# EAGLE board Motor_Cape (EAGLE 7.7.0)
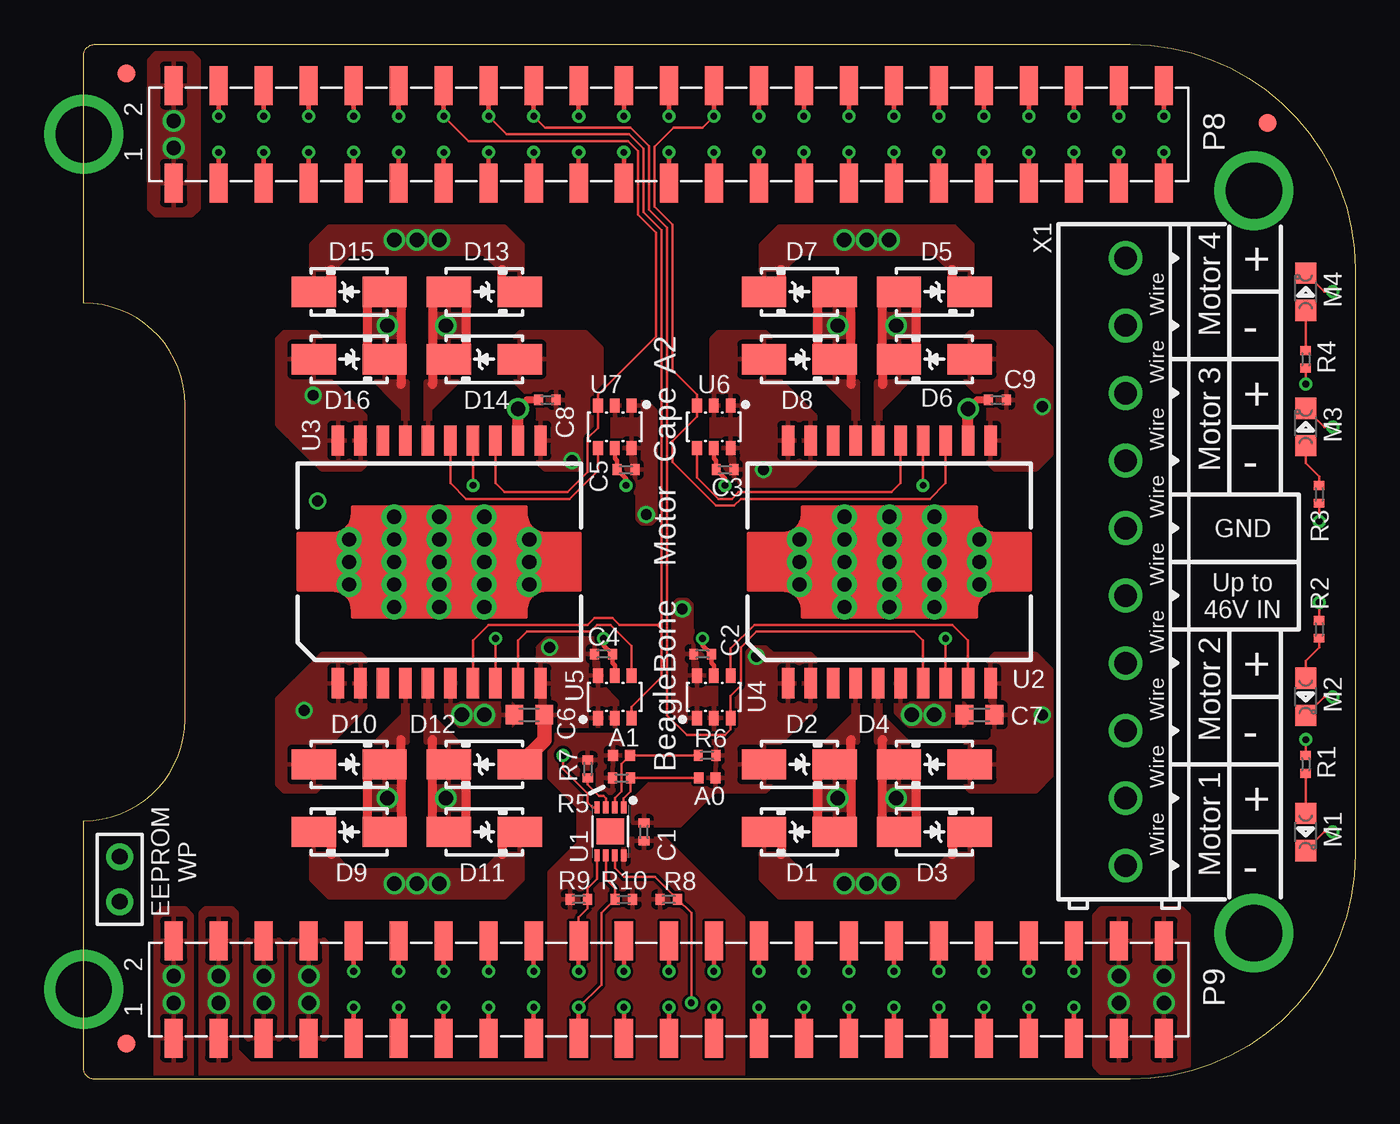
[diagram p0: board, top side]
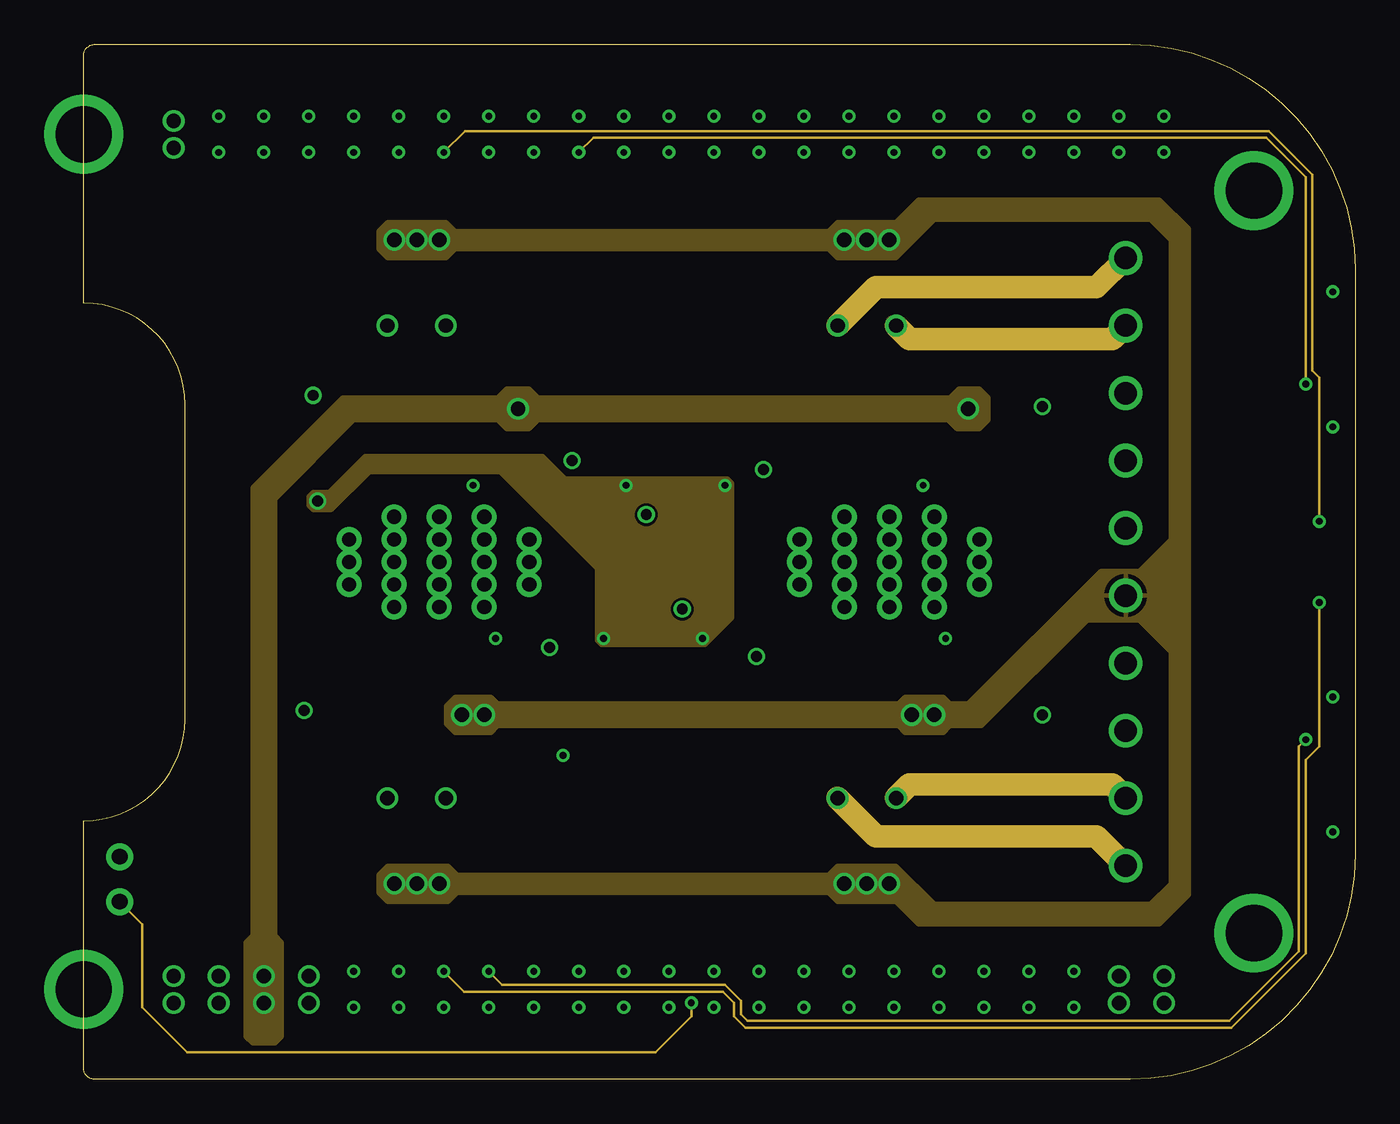
[diagram p1: board, inner layer Power]
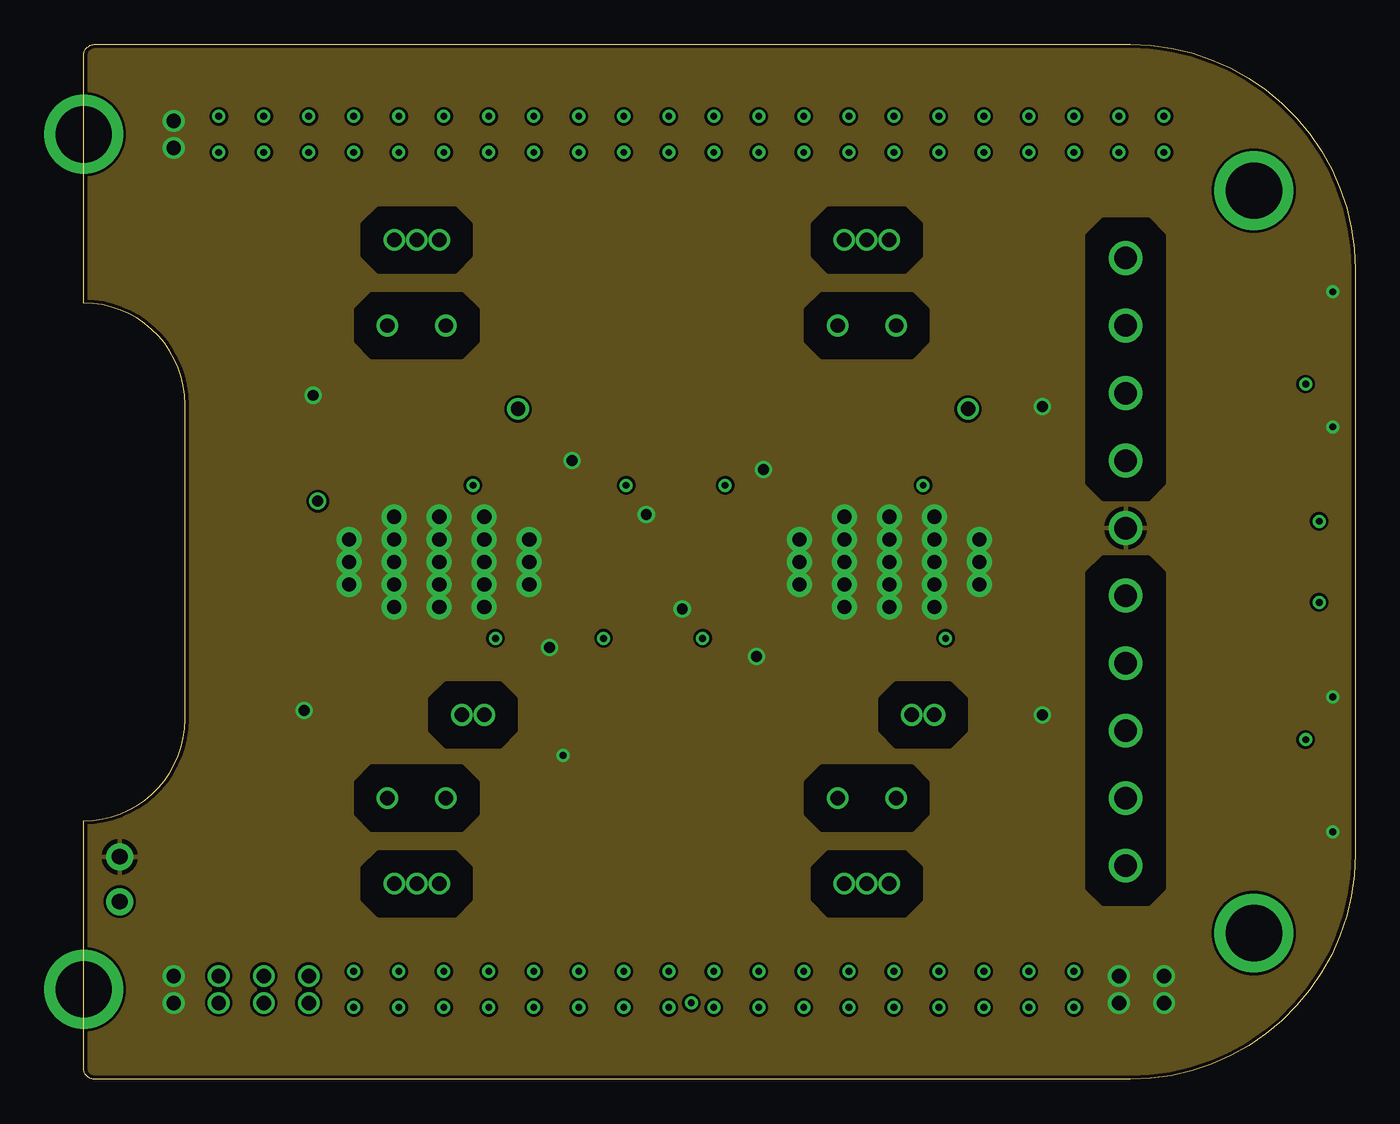
[diagram p2: board, inner layer Ground]
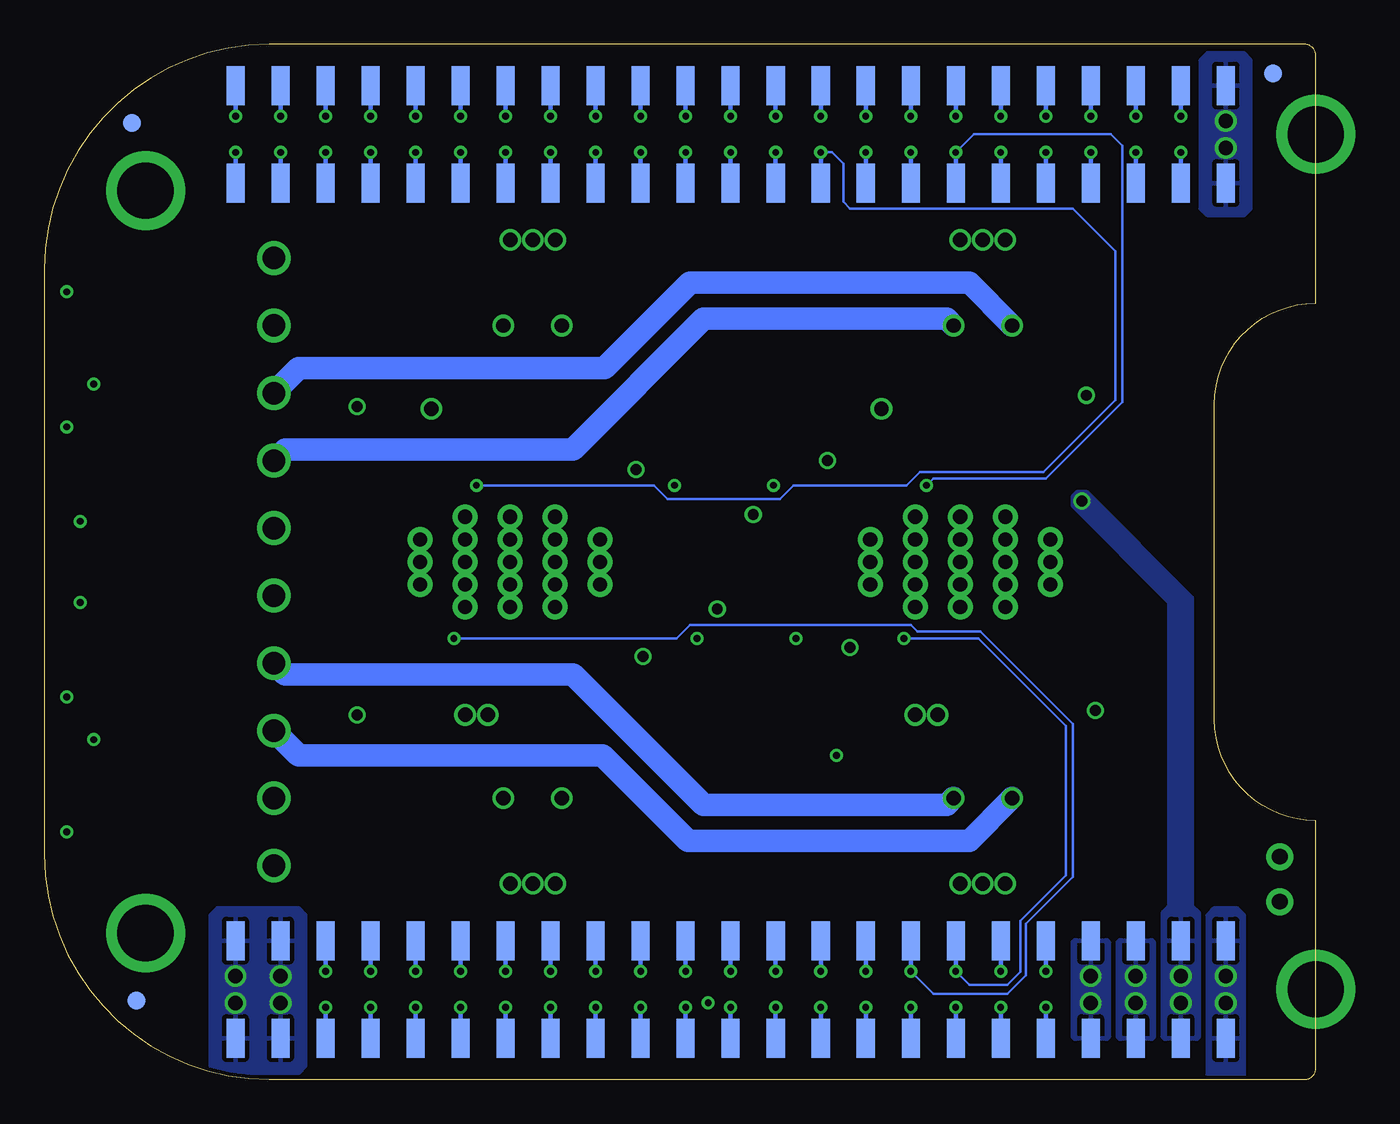
[diagram p3: board, bottom side, seen from below]

Size 71.75 x 58.42 mm. Coordinates in mm from the lower left corner, seen from the top.
Copper layers (1+2+15+16): Top 0.035mm / dielectric 1.5mm / Power 0.035mm / dielectric 0.15mm / Ground 0.035mm / dielectric 0.2mm / Bottom 0.035mm
Design rules "SparkFun-2-layer *": minimum track width 6mil, minimum drill 15mil, track to track 6mil, track to pad 6mil, pad to pad 6mil, via to via 6mil, smd to smd 6mil, copper to edge 8mil, drill to drill 8mil, minimum pad ring 12mil, minimum via ring 7mil, stop-mask expansion 4mil, vias tented up to drill 32mil, thermal gap 10mil
tRestrict: area 14.9,22 to 15.1,22.7; area 40.3,22 to 40.5,22.7; area 40.3,35.7 to 40.5,36.4; area 14.9,35.7 to 15.1,36.4; 4 lines

## Footprints (pad centres in the part's own frame; a part is rotated, then mirrored left to right if it is on the bottom)
BEAGLEBONE.CAPE.TOP/BOTTOM-PADS = smd 1.02 x 2.2 bottom: B8.1 5.08,50.59; B8.2 5.08,56.09; B8.3 7.62,50.59; B8.4 7.62,56.09; B8.5 10.16,50.59; B8.6 10.16,56.09; B8.7 12.7,50.59; B8.8 12.7,56.09; B8.9 15.24,50.59; B8.10 15.24,56.09; B8.11 17.78,50.59; B8.12 17.78,56.09; B8.13 20.32,50.59; B8.14 20.32,56.09; B8.15 22.86,50.59; B8.16 22.86,56.09; B8.17 25.4,50.59; B8.18 25.4,56.09; B8.19 27.94,50.59; B8.20 27.94,56.09; B8.21 30.48,50.59; B8.22 30.48,56.09; B8.23 33.02,50.59; B8.24 33.02,56.09; B8.25 35.56,50.59; B8.26 35.56,56.09; B8.27 38.1,50.59; B8.28 38.1,56.09; B8.29 40.64,50.59; B8.30 40.64,56.09; B8.31 43.18,50.59; B8.32 43.18,56.09; B8.33 45.72,50.59; B8.34 45.72,56.09; B8.35 48.26,50.59; B8.36 48.26,56.09; B8.37 50.8,50.59; B8.38 50.8,56.09; B8.39 53.34,50.59; B8.40 53.34,56.09; B8.41 55.88,50.59; B8.42 55.88,56.09; B8.43 58.42,50.59; B8.44 58.42,56.09; B8.45 60.96,50.59; B8.46 60.96,56.09; B9.1 5.08,2.33; B9.2 5.08,7.83; B9.3 7.62,2.33; B9.4 7.62,7.83; B9.5 10.16,2.33; B9.6 10.16,7.83; B9.7 12.7,2.33; B9.8 12.7,7.83; B9.9 15.24,2.33; B9.10 15.24,7.83; B9.11 17.78,2.33; B9.12 17.78,7.83; B9.13 20.32,2.33; B9.14 20.32,7.83; B9.15 22.86,2.33; B9.16 22.86,7.83; B9.17 25.4,2.33; B9.18 25.4,7.83; B9.19 27.94,2.33; B9.20 27.94,7.83; B9.21 30.48,2.33; B9.22 30.48,7.83; B9.23 33.02,2.33; B9.24 33.02,7.83; B9.25 35.56,2.33; B9.26 35.56,7.83; B9.27 38.1,2.33; B9.28 38.1,7.83; B9.29 40.64,2.33; B9.30 40.64,7.83; B9.31 43.18,2.33; B9.32 43.18,7.83; B9.33 45.72,2.33; B9.34 45.72,7.83; B9.35 48.26,2.33; B9.36 48.26,7.83; B9.37 50.8,2.33; B9.38 50.8,7.83; B9.39 53.34,2.33; B9.40 53.34,7.83; B9.41 55.88,2.33; B9.42 55.88,7.83; B9.43 58.42,2.33; B9.44 58.42,7.83; B9.45 60.96,2.33; B9.46 60.96,7.83 | drill 3.175 pad 4.445: MH.1 0,5.08; MH.2 66.04,8.255; MH.3 66.04,50.165; MH.4 0,53.34 | smd 1.02 x 2.2: T8.1 5.08,50.59; T8.2 5.08,56.09; T8.3 7.62,50.59; T8.4 7.62,56.09; T8.5 10.16,50.59; T8.6 10.16,56.09; T8.7 12.7,50.59; T8.8 12.7,56.09; T8.9 15.24,50.59; T8.10 15.24,56.09; T8.11 17.78,50.59; T8.12 17.78,56.09; T8.13 20.32,50.59; T8.14 20.32,56.09; T8.15 22.86,50.59; T8.16 22.86,56.09; T8.17 25.4,50.59; T8.18 25.4,56.09; T8.19 27.94,50.59; T8.20 27.94,56.09; T8.21 30.48,50.59; T8.22 30.48,56.09; T8.23 33.02,50.59; T8.24 33.02,56.09; T8.25 35.56,50.59; T8.26 35.56,56.09; T8.27 38.1,50.59; T8.28 38.1,56.09; T8.29 40.64,50.59; T8.30 40.64,56.09; T8.31 43.18,50.59; T8.32 43.18,56.09; T8.33 45.72,50.59; T8.34 45.72,56.09; T8.35 48.26,50.59; T8.36 48.26,56.09; T8.37 50.8,50.59; T8.38 50.8,56.09; T8.39 53.34,50.59; T8.40 53.34,56.09; T8.41 55.88,50.59; T8.42 55.88,56.09; T8.43 58.42,50.59; T8.44 58.42,56.09; T8.45 60.96,50.59; T8.46 60.96,56.09; T9.1 5.08,2.33; T9.2 5.08,7.83; T9.3 7.62,2.33; T9.4 7.62,7.83; T9.5 10.16,2.33; T9.6 10.16,7.83; T9.7 12.7,2.33; T9.8 12.7,7.83; T9.9 15.24,2.33; T9.10 15.24,7.83; T9.11 17.78,2.33; T9.12 17.78,7.83; T9.13 20.32,2.33; T9.14 20.32,7.83; T9.15 22.86,2.33; T9.16 22.86,7.83; T9.17 25.4,2.33; T9.18 25.4,7.83; T9.19 27.94,2.33; T9.20 27.94,7.83; T9.21 30.48,2.33; T9.22 30.48,7.83; T9.23 33.02,2.33; T9.24 33.02,7.83; T9.25 35.56,2.33; T9.26 35.56,7.83; T9.27 38.1,2.33; T9.28 38.1,7.83; T9.29 40.64,2.33; T9.30 40.64,7.83; T9.31 43.18,2.33; T9.32 43.18,7.83; T9.33 45.72,2.33; T9.34 45.72,7.83; T9.35 48.26,2.33; T9.36 48.26,7.83; T9.37 50.8,2.33; T9.38 50.8,7.83; T9.39 53.34,2.33; T9.40 53.34,7.83; T9.41 55.88,2.33; T9.42 55.88,7.83; T9.43 58.42,2.33; T9.44 58.42,7.83; T9.45 60.96,2.33; T9.46 60.96,7.83
0402 = smd 0.5 x 0.6: 1 -0.5,0; 2 0.5,0
0603 = smd 1 x 1.1: 1 -0.85,0; 2 0.85,0
SMA(DIODES) = smd 2.5 x 1.7: A 2,0; K -2,0
FIDUCIAL_40MIL = smd 1.016 x 1.016: P$1 0,0
JUMPER-(X2) = drill 0.889 pad 1.524: 1 -1.27,0; 2 1.27,0
0805-LED = smd 1.2 x 1.2: A 0,1.05; K 0,-1.05
SOLDER.JOINT(0402) = smd 0.55 x 0.6: 1 -0.475,0; 2 0.475,0
UDFN8,2X3(ON-SEMI) = smd 0.3 x 0.68: 1 0.75,1.36; 2 0.25,1.36; 3 -0.25,1.36; 4 -0.75,1.36; 5 -0.75,-1.36; 6 -0.25,-1.36; 7 0.25,-1.36; 8 0.75,-1.36 | smd 1.56 x 1.45: P$1 0,0
POWER.SO-20(ST)-A.W/TV = smd 0.7 x 1.7: 1 -5.715,-6.85; 2 -4.445,-6.85; 3 -3.175,-6.85; 4 -1.905,-6.85; 5 -0.635,-6.85; 6 0.635,-6.85; 7 1.905,-6.85; 8 3.175,-6.85; 9 4.445,-6.85; 10 5.715,-6.85; 11 5.715,6.85; 12 4.445,6.85; 13 3.175,6.85; 14 1.905,6.85; 15 0.635,6.85; 16 -0.635,6.85; 17 -1.905,6.85; 18 -3.175,6.85; 19 -4.445,6.85; 20 -5.715,6.85 | smd 1 x 1: THERMAL.PAD 0,0 | drill 0.8: TV1 -5.08,1.27; TV2 -5.08,0; TV3 -5.08,-1.27; TV4 -2.54,2.54; TV5 -2.54,1.27; TV6 -2.54,0; TV7 -2.54,-1.27; TV8 -2.54,-2.54; TV9 0,2.54; TV10 0,1.27; TV11 0,0; TV12 0,-1.27; TV13 0,-2.54; TV14 2.54,2.54; TV15 2.54,1.27; TV16 2.54,0; TV17 2.54,-1.27; TV18 2.54,-2.54; TV19 5.08,1.27; TV20 5.08,0; TV21 5.08,-1.27
SOT-23-6 = smd 0.55 x 0.8: GND 0,-1.2; IN0 0.95,-1.2; IN1 -0.95,-1.2; IN2 -0.95,1.2; VCC 0,1.2; Y 0.95,1.2
TERMINAL.BLOCK-10TERM-150MIL.PITCH = drill 1.27 pad 1.905: 1 -17.145,0; 2 -13.335,0; 3 -9.525,0; 4 -5.715,0; 5 -1.905,0; 6 1.905,0; 7 5.715,0; 8 9.525,0; 9 13.335,0; 10 17.145,0

## Placement (x,y rotation side)
BB.CAPE1  BEAGLEBONE.CAPE.TOP/BOTTOM-PADS  [BEAGLEBONE.CAPE.TOP/BOTTOM-PADS]  0,0 0 top
C1  .1uF  [0402]  31.62,13.97 90 top
C2  .1uF  [0402]  34.92,24 180 top
C3  .1uF  [0402]  36.2,34.42 0 top
C4  .1uF  [0402]  29.34,24 180 top
C5  .1uF  [0402]  30.61,34.42 0 top
C6  .1uF 50V  [0603]  25.15,20.57 0 top
C7  .1uF 50V  [0603]  50.55,20.57 0 top
C8  .1uF  [0402]  26.16,38.35 0 top
C9  .1uF  [0402]  51.56,38.35 0 top
D1  B260A-13-F 60V 2A  [SMA(DIODES)]  40.39,13.97 0 top
D2  B260A-13-F 60V 2A  [SMA(DIODES)]  40.39,17.78 180 top
D3  B260A-13-F 60V 2A  [SMA(DIODES)]  48.01,13.97 180 top
D4  B260A-13-F 60V 2A  [SMA(DIODES)]  48.01,17.78 0 top
D5  B260A-13-F 60V 2A  [SMA(DIODES)]  48.01,44.45 180 top
D6  B260A-13-F 60V 2A  [SMA(DIODES)]  48.01,40.64 0 top
D7  B260A-13-F 60V 2A  [SMA(DIODES)]  40.39,44.45 0 top
D8  B260A-13-F 60V 2A  [SMA(DIODES)]  40.39,40.64 180 top
D9  B260A-13-F 60V 2A  [SMA(DIODES)]  14.99,13.97 0 top
D10  B260A-13-F 60V 2A  [SMA(DIODES)]  14.99,17.78 180 top
D11  B260A-13-F 60V 2A  [SMA(DIODES)]  22.61,13.97 180 top
D12  B260A-13-F 60V 2A  [SMA(DIODES)]  22.61,17.78 0 top
D13  B260A-13-F 60V 2A  [SMA(DIODES)]  22.61,44.45 180 top
D14  B260A-13-F 60V 2A  [SMA(DIODES)]  22.61,40.64 0 top
D15  B260A-13-F 60V 2A  [SMA(DIODES)]  14.99,44.45 0 top
D16  B260A-13-F 60V 2A  [SMA(DIODES)]  14.99,40.64 180 top
FUD1  FIDUCIAL  [FIDUCIAL_40MIL]  2.41,2.03 0 top
FUD2  FIDUCIAL  [FIDUCIAL_40MIL]  66.8,53.98 0 top
FUD3  FIDUCIAL  [FIDUCIAL_40MIL]  2.41,56.77 0 top
FUD4  FIDUCIAL  [FIDUCIAL_40MIL]  66.55,4.45 0 bottom
FUD5  FIDUCIAL  [FIDUCIAL_40MIL]  2.41,56.77 0 bottom
FUD6  FIDUCIAL  [FIDUCIAL_40MIL]  66.8,53.98 0 bottom
JMP1  JUMPER-(X2)  [JUMPER-(X2)]  2.03,11.3 90 top
M1  RED  [0805-LED]  68.96,13.97 0 top
M2  RED  [0805-LED]  68.96,21.59 0 top
M3  RED  [0805-LED]  68.96,36.83 180 top
M4  RED  [0805-LED]  68.96,44.45 180 top
R1  1k  [0402]  68.96,17.78 270 top
R2  1k  [0402]  69.72,25.4 270 top
R3  1k  [0402]  69.72,33.02 270 top
R4  1k  [0402]  68.96,40.64 270 top
R5  1k  [0402]  30.35,17.02 0 top
R6  1k  [0402]  35.18,18.29 180 top
R7  1k  [0402]  28.45,17.53 270 top
R8  1k  [0402]  33.02,10.16 180 top
R9  DNP(2.2k)  [0402]  27.94,10.16 180 top
R10  DNP(2.2k)  [0402]  30.48,10.16 0 top
SJ1  [SOLDER.JOINT(0402)]  35.18,17.02 180 top
SJ2  [SOLDER.JOINT(0402)]  30.35,18.29 0 top
U1  [UDFN8,2X3(ON-SEMI)]  29.72,14 0 top
U2  [POWER.SO-20(ST)-A.W/TV]  45.47,29.21 0 top
U3  [POWER.SO-20(ST)-A.W/TV]  20.07,29.21 0 top
U4  74LVC1G57  [SOT-23-6]  35.56,21.59 0 top
U5  74LVC1G57  [SOT-23-6]  29.97,21.59 0 top
U6  74LVC1G57  [SOT-23-6]  35.56,36.83 180 top
U7  74LVC1G57  [SOT-23-6]  29.97,36.83 180 top
X1  [TERMINAL.BLOCK-10TERM-150MIL.PITCH]  58.8,29.21 270 top

## Library data of the parts
BB.CAPE1 = GHI-Solutions
C1-C9 D1-D16 M1-M4 R1-R10 = GHI-BasicComponents
FUD1-FUD6 = GHI
JMP1 = GHI-Headers
SJ1 SJ2 = GHI-Miscellaneous
U1-U7 = GHI-IC
X1 = GHI-Connectors

## Nets
+5V [power]: BB.CAPE1.B9.5 BB.CAPE1.B9.6 BB.CAPE1.T9.5 BB.CAPE1.T9.6 C8.1 C9.1 U2.12 U3.12
A0: R5.2 SJ1.2 U1.1
A1: R6.2 SJ2.2 U1.2
A2: R7.2 U1.3
GND: BB.CAPE1.B8.1 BB.CAPE1.B8.2 BB.CAPE1.B9.1 BB.CAPE1.B9.2 BB.CAPE1.B9.43 BB.CAPE1.B9.44 BB.CAPE1.B9.45 BB.CAPE1.B9.46 BB.CAPE1.T8.1 BB.CAPE1.T8.2 BB.CAPE1.T9.1 BB.CAPE1.T9.2 BB.CAPE1.T9.43 BB.CAPE1.T9.44 BB.CAPE1.T9.45 BB.CAPE1.T9.46 C1.2 C2.2 C3.2 C4.2 C5.2 C6.2 C7.2 C8.2 C9.2 D2.A D4.A D6.A D8.A D10.A D12.A D14.A D16.A JMP1.2 M1.K M2.K M3.K M4.K R6.1 SJ1.1 U1.4 U2.1 U2.2 U2.10 U2.11 U2.19 U2.20 U2.THERMAL.PAD U2.TV1 U2.TV2 U2.TV3 U2.TV4 U2.TV5 U2.TV6 U2.TV7 U2.TV8 U2.TV9 U2.TV10 U2.TV11 U2.TV12 U2.TV13 U2.TV14 U2.TV15 U2.TV16 U2.TV17 U2.TV18 U2.TV19 U2.TV20 U2.TV21 U3.1 U3.2 U3.10 U3.11 U3.19 U3.20 U3.THERMAL.PAD U3.TV1 U3.TV2 U3.TV3 U3.TV4 U3.TV5 U3.TV6 U3.TV7 U3.TV8 U3.TV9 U3.TV10 U3.TV11 U3.TV12 U3.TV13 U3.TV14 U3.TV15 U3.TV16 U3.TV17 U3.TV18 U3.TV19 U3.TV20 U3.TV21 U4.GND U4.IN1 U4.IN2 U5.GND U5.IN1 U5.IN2 U6.GND U6.IN1 U6.IN2 U7.GND U7.IN1 U7.IN2 X1.5
M1+: D3.A D4.K U2.5 X1.9
M1-: D1.A D2.K U2.4 X1.10
M1.HIGH: BB.CAPE1.B8.18 BB.CAPE1.T8.18 U2.7 U4.IN0
M1.LOW: U2.9 U4.Y
M1.PWM1.B: BB.CAPE1.B9.16 BB.CAPE1.T9.16 R1.1 U2.8
M2+: D11.A D12.K U3.5 X1.7
M2-: D9.A D10.K U3.4 X1.8
M2.HIGH: BB.CAPE1.B8.16 BB.CAPE1.T8.16 U3.7 U5.IN0
M2.LOW: U3.9 U5.Y
M2.PWM1.A: BB.CAPE1.B9.14 BB.CAPE1.T9.14 R2.1 U3.8
M3+: D15.A D16.K U3.17 X1.3
M3-: D13.A D14.K U3.16 X1.4
M3.HIGH: BB.CAPE1.B8.14 BB.CAPE1.T8.14 U3.13 U7.IN0
M3.LOW: U3.15 U7.Y
M3.PWM2.B: BB.CAPE1.B8.13 BB.CAPE1.T8.13 R3.2 U3.14
M4+: D7.A D8.K U2.17 X1.1
M4-: D5.A D6.K U2.16 X1.2
M4.HIGH: BB.CAPE1.B8.26 BB.CAPE1.T8.26 U2.13 U6.IN0
M4.LOW: U2.15 U6.Y
M4.PWM2.A: BB.CAPE1.B8.19 BB.CAPE1.T8.19 R4.2 U2.14
N$3: M1.A R1.2
N$4: M2.A R2.2
N$5: M3.A R3.1
N$6: M4.A R4.1
P8.3: BB.CAPE1.B8.3 BB.CAPE1.T8.3
P8.4: BB.CAPE1.B8.4 BB.CAPE1.T8.4
P8.5: BB.CAPE1.B8.5 BB.CAPE1.T8.5
P8.6: BB.CAPE1.B8.6 BB.CAPE1.T8.6
P8.7: BB.CAPE1.B8.7 BB.CAPE1.T8.7
P8.8: BB.CAPE1.B8.8 BB.CAPE1.T8.8
P8.9: BB.CAPE1.B8.9 BB.CAPE1.T8.9
P8.10: BB.CAPE1.B8.10 BB.CAPE1.T8.10
P8.11: BB.CAPE1.B8.11 BB.CAPE1.T8.11
P8.12: BB.CAPE1.B8.12 BB.CAPE1.T8.12
P8.15: BB.CAPE1.B8.15 BB.CAPE1.T8.15
P8.17: BB.CAPE1.B8.17 BB.CAPE1.T8.17
P8.20: BB.CAPE1.B8.20 BB.CAPE1.T8.20
P8.21: BB.CAPE1.B8.21 BB.CAPE1.T8.21
P8.22: BB.CAPE1.B8.22 BB.CAPE1.T8.22
P8.23: BB.CAPE1.B8.23 BB.CAPE1.T8.23
P8.24: BB.CAPE1.B8.24 BB.CAPE1.T8.24
P8.25: BB.CAPE1.B8.25 BB.CAPE1.T8.25
P8.27: BB.CAPE1.B8.27 BB.CAPE1.T8.27
P8.28: BB.CAPE1.B8.28 BB.CAPE1.T8.28
P8.29: BB.CAPE1.B8.29 BB.CAPE1.T8.29
P8.30: BB.CAPE1.B8.30 BB.CAPE1.T8.30
P8.31: BB.CAPE1.B8.31 BB.CAPE1.T8.31
P8.32: BB.CAPE1.B8.32 BB.CAPE1.T8.32
P8.33: BB.CAPE1.B8.33 BB.CAPE1.T8.33
P8.34: BB.CAPE1.B8.34 BB.CAPE1.T8.34
P8.35: BB.CAPE1.B8.35 BB.CAPE1.T8.35
P8.36: BB.CAPE1.B8.36 BB.CAPE1.T8.36
P8.37: BB.CAPE1.B8.37 BB.CAPE1.T8.37
P8.38: BB.CAPE1.B8.38 BB.CAPE1.T8.38
P8.39: BB.CAPE1.B8.39 BB.CAPE1.T8.39
P8.40: BB.CAPE1.B8.40 BB.CAPE1.T8.40
P8.41: BB.CAPE1.B8.41 BB.CAPE1.T8.41
P8.42: BB.CAPE1.B8.42 BB.CAPE1.T8.42
P8.43: BB.CAPE1.B8.43 BB.CAPE1.T8.43
P8.44: BB.CAPE1.B8.44 BB.CAPE1.T8.44
P8.45: BB.CAPE1.B8.45 BB.CAPE1.T8.45
P8.46: BB.CAPE1.B8.46 BB.CAPE1.T8.46
P9.9: BB.CAPE1.B9.9 BB.CAPE1.T9.9
P9.10: BB.CAPE1.B9.10 BB.CAPE1.T9.10
P9.11: BB.CAPE1.B9.11 BB.CAPE1.T9.11
P9.12: BB.CAPE1.B9.12 BB.CAPE1.T9.12
P9.13: BB.CAPE1.B9.13 BB.CAPE1.T9.13
P9.15: BB.CAPE1.B9.15 BB.CAPE1.T9.15
P9.17: BB.CAPE1.B9.17 BB.CAPE1.T9.17
P9.18: BB.CAPE1.B9.18 BB.CAPE1.T9.18
P9.21: BB.CAPE1.B9.21 BB.CAPE1.T9.21
P9.22: BB.CAPE1.B9.22 BB.CAPE1.T9.22
P9.23: BB.CAPE1.B9.23 BB.CAPE1.T9.23
P9.24: BB.CAPE1.B9.24 BB.CAPE1.T9.24
P9.25: BB.CAPE1.B9.25 BB.CAPE1.T9.25
P9.26: BB.CAPE1.B9.26 BB.CAPE1.T9.26
P9.27: BB.CAPE1.B9.27 BB.CAPE1.T9.27
P9.28: BB.CAPE1.B9.28 BB.CAPE1.T9.28
P9.29: BB.CAPE1.B9.29 BB.CAPE1.T9.29
P9.30: BB.CAPE1.B9.30 BB.CAPE1.T9.30
P9.31: BB.CAPE1.B9.31 BB.CAPE1.T9.31
P9.32: BB.CAPE1.B9.32 BB.CAPE1.T9.32
P9.33: BB.CAPE1.B9.33 BB.CAPE1.T9.33
P9.34: BB.CAPE1.B9.34 BB.CAPE1.T9.34
P9.35: BB.CAPE1.B9.35 BB.CAPE1.T9.35
P9.36: BB.CAPE1.B9.36 BB.CAPE1.T9.36
P9.37: BB.CAPE1.B9.37 BB.CAPE1.T9.37
P9.38: BB.CAPE1.B9.38 BB.CAPE1.T9.38
P9.39: BB.CAPE1.B9.39 BB.CAPE1.T9.39
P9.40: BB.CAPE1.B9.40 BB.CAPE1.T9.40
P9.41: BB.CAPE1.B9.41 BB.CAPE1.T9.41
P9.42: BB.CAPE1.B9.42 BB.CAPE1.T9.42
SCL: BB.CAPE1.B9.19 BB.CAPE1.T9.19 R10.1 U1.6
SDA: BB.CAPE1.B9.20 BB.CAPE1.T9.20 R9.1 U1.5
SYS.VOUT: BB.CAPE1.B9.7 BB.CAPE1.B9.8 BB.CAPE1.T9.7 BB.CAPE1.T9.8
VCC: BB.CAPE1.B9.3 BB.CAPE1.B9.4 BB.CAPE1.T9.3 BB.CAPE1.T9.4 C1.1 C2.1 C3.1 C4.1 C5.1 R5.1 R7.1 R8.2 R9.2 R10.2 SJ2.1 U1.8 U4.VCC U5.VCC U6.VCC U7.VCC
VIN: C6.1 C7.1 D1.K D3.K D5.K D7.K D9.K D11.K D13.K D15.K U2.6 U3.6 X1.6
WP: JMP1.1 R8.1 U1.7

## Tracks (layer width: path | path; a pad name or v marks a point on that pad's centre or on a via)
+5V  (via drill 0.81 pad 0.18)
  Top 0.406: C8.1 25.02,38.35 v24.51,37.85 | C9.1 50.42,38.35 v49.91,37.85
  Top 0.61: U2.12 v49.91,37.85 | U3.12 v24.51,37.85
  other vias: 10.16,4.32 10.16,5.84
  pour Bottom: 10.79,8.13 9.53,8.13 9.14,7.75 9.14,2.41 9.53,2.03 10.79,2.03 11.18,2.41 11.18,7.75
  pour Power: 10.79,8.13 10.79,32.77 15.24,37.21 23.37,37.21 23.88,36.7 25.15,36.7 25.65,37.21 48.77,37.21 49.28,36.7 50.55,36.7 51.05,37.21 51.05,38.48 50.55,38.99 49.4,38.99 48.9,38.48 25.65,38.48 25.15,38.99 23.88,38.99 23.37,38.48 14.61,38.48 9.53,33.4 9.53,8.13 9.14,7.75 9.14,2.41 9.53,2.03 10.79,2.03 11.18,2.41 11.18,7.75
  pour Top: 10.79,8.13 9.53,8.13 9.14,7.75 9.14,2.41 9.53,2.03 10.79,2.03 11.18,2.41 11.18,7.75
A0
  Top 0.152: U1.1 30.47,15.87 30.85,16.25 R5.2 SJ1.2
A1
  Top 0.152: U1.2 29.97,15.88 30.35,16.26 30.35,17.81 SJ2.2 R6.2
A2
  Top 0.152: U1.3 29.47,15.87 29.34,16 29.08,16 28.45,16.64 R7.2
GEB
  cutout Ground: 20.45,22.35 23.5,22.35 24.38,21.46 24.38,19.68 23.5,18.8 20.45,18.8 19.56,19.68 19.56,21.46
GEB1
  cutout Ground: 45.85,22.35 48.9,22.35 49.78,21.46 49.78,19.68 48.9,18.8 45.85,18.8 44.96,19.68 44.96,21.46
GEB2
  cutout Ground: 42.04,12.83 46.35,12.83 47.24,11.94 47.24,10.16 46.35,9.27 42.04,9.27 41.15,10.16 41.15,11.94
GEB3
  cutout Ground: 16.64,12.83 20.95,12.83 21.84,11.94 21.84,10.16 20.95,9.27 16.64,9.27 15.75,10.16 15.75,11.94
GEB4
  cutout Ground: 56.64,10.79 56.64,28.57 57.53,29.46 60.07,29.46 60.96,28.57 60.96,10.79 60.07,9.91 57.53,9.91
GEB5
  cutout Ground: 56.64,33.66 56.64,47.62 57.53,48.51 60.07,48.51 60.96,47.62 60.96,33.66 60.07,32.77 57.53,32.77
GEB6
  cutout Ground: 16.64,49.15 20.95,49.15 21.84,48.26 21.84,46.48 20.95,45.59 16.64,45.59 15.75,46.48 15.75,48.26
GEB7
  cutout Ground: 42.04,49.15 46.35,49.15 47.24,48.26 47.24,46.48 46.35,45.59 42.04,45.59 41.15,46.48 41.15,48.26
GEB8
  cutout Ground: 41.66,44.32 46.74,44.32 47.62,43.43 47.62,41.66 46.74,40.77 41.66,40.77 40.77,41.66 40.77,43.43
GEB9
  cutout Ground: 16.26,44.32 21.34,44.32 22.23,43.43 22.23,41.66 21.34,40.77 16.26,40.77 15.37,41.66 15.37,43.43
GEB10
  cutout Ground: 16.26,17.65 21.34,17.65 22.23,16.76 22.23,14.99 21.34,14.1 16.26,14.1 15.37,14.99 15.37,16.76
GEB11
  cutout Ground: 41.66,17.65 46.74,17.65 47.62,16.76 47.62,14.99 46.74,14.1 41.66,14.1 40.77,14.99 40.77,16.76
GND  (via drill 0.38 pad 0.18, 0.61 pad 0.18, 0.81 pad 0.18)
  Top 0.152: M1.K 70.01,13.97 v70.48,13.97 | M2.K 70.01,21.59 v70.48,21.59 | M3.K 70.01,36.83 v70.48,36.83 | M4.K 70.01,44.45 v70.48,44.45 | U1.4 28.71,15.36 28.45,15.62 28.45,16.13 27.05,17.53 v27.05,18.29
  Top 0.813: D12.A 26,19.17 C6.2
  other vias: 58.42,4.32 60.96,4.32 5.08,52.58 5.08,54.1 58.42,5.84 60.96,5.84 5.08,5.84 5.08,4.32 26.29,24.38 12.45,20.83 37.97,23.88 54.1,20.57 12.95,38.61 38.35,34.42 27.56,34.92 54.1,37.97 31.75,31.88 33.78,26.54
  pour Ground (rank 2): 72.39,59.05 -0.64,59.05 -0.64,-0.64 72.39,-0.64
  pour Top: 61.98,9.65 57.4,9.65 57.02,9.27 57.02,0.76 57.4,0.38 61.98,0.38 62.36,0.76 62.36,9.27
  pour Top: 4.06,57.91 6.1,57.91 6.48,57.53 6.48,49.15 6.1,48.77 4.06,48.77 3.68,49.15 3.68,57.53
  pour Top: 5.71,9.65 4.45,9.65 4.06,9.27 4.06,-0.13 6.1,-0.13 6.1,9.27
  pour Bottom: 5.71,9.65 4.45,9.65 4.06,9.27 4.06,-0.13 6.1,-0.13 6.1,9.27
  pour Bottom: 61.98,9.65 57.4,9.65 57.02,9.27 57.02,0.76 57.4,0.38 61.98,0.38 62.36,0.76 62.36,9.27
  pour Bottom: 4.06,57.91 6.1,57.91 6.48,57.53 6.48,49.15 6.1,48.77 4.06,48.77 3.68,49.15 3.68,57.53
  pour Top: 25.65,20.45 26.42,20.45 26.92,19.94 30.1,19.94 30.1,21.34 29.21,22.23 29.21,23.37 28.96,23.62 28.96,24.89 26.16,24.89 25.65,24.38
  pour Top: 13.34,17.91 13.34,16.51 13.08,16.26 11.3,16.26 10.92,16.64 10.92,21.46 13.08,23.62 13.46,24 15.62,24 15.88,23.75 15.88,20.95 13.34,18.41
  pour Top: 38.73,18.41 38.73,16.51 38.48,16.26 35.56,16.26 33.66,14.35 31.11,14.35 30.99,14.48 30.99,15.75 32.26,17.02 35.56,17.02 35.56,20.7 37.47,22.61 37.47,24.13 37.72,24.38 38.48,24.38 38.86,24 41.02,24 41.27,23.75 41.27,20.95
  pour Top: 49.78,19.05 49.78,16.51 50.04,16.26 53.72,16.26 54.61,17.14 54.61,23.11 53.72,24 51.44,24 51.05,23.62 51.05,21.46 51.31,21.21 51.31,19.3 51.05,19.05
  pour Top: 13.34,40.51 13.34,41.91 13.08,42.16 11.3,42.16 10.92,41.78 10.92,36.96 13.08,34.8 13.46,34.42 15.62,34.42 15.88,34.67 15.88,37.47 13.34,40.01
  pour Top: 38.73,40.01 38.73,41.91 38.48,42.16 35.81,42.16 35.43,41.78 35.43,35.31 37.21,33.53 40.13,33.53 41.27,34.67 41.27,37.47
  pour Top: 35.69,24 34.29,25.4 34.29,26.8 34.04,27.05 33.53,27.05 33.27,26.8 33.27,20.7 33.78,20.19 35.69,20.19
  pour Top: 49.78,39.37 49.78,41.91 50.04,42.16 53.72,42.16 54.61,41.27 54.61,35.31 53.72,34.42 51.44,34.42 51.05,34.8 51.05,38.1
  pour Top: 24.38,39.37 24.38,41.91 24.64,42.16 28.32,42.16 29.21,41.27 29.21,35.31 28.32,34.42 26.04,34.42 25.65,34.8 25.65,38.1
  pour Top: 29.84,34.42 31.24,33.02 31.24,31.62 31.5,31.37 32,31.37 32.26,31.62 32.26,37.72 31.75,38.23 29.84,38.23
M1+  (via drill 0.81 pad 0.18)
  Top 0.508: 45.09,17.78 D4.K 46.99,17.78 46.99,13.97 D3.A 45.09,13.97 45.09,17.53 45.09,17.78 | 45.09,17.78 45.09,19.18
  Power 1.27: v45.85,15.88 46.61,16.64 58.04,16.64 X1.9
  pour Top: 47.12,18.41 47.12,14.73 44.96,14.73 44.96,18.8 44.7,19.05 44.7,22.61 44.96,22.61 44.96,20.57
M1-  (via drill 0.81 pad 0.18)
  Top 0.508: 43.31,17.78 D2.K 41.4,17.78 41.4,13.97 D1.A 43.31,13.97 43.31,17.53 43.31,17.78 | 43.31,17.78 43.31,19.18
  Power 1.27: v42.55,15.88 44.7,13.72 57.15,13.72 X1.10
  pour Top: 43.43,18.8 43.43,14.73 41.27,14.73 41.27,18.41 43.43,20.57 43.43,22.61 43.69,22.61 43.69,19.05
M1.HIGH  (via drill 0.38 pad 0.18)
  Top 0.152: U2.7 47.37,24.77 46.86,25.27 37.97,25.27 37.08,24.38 37.08,22.23 36.51,21.65 U4.IN0 36.51,19.75 36.2,19.43 34.04,19.43 32.92,20.55 32.92,48.08 31.9,49.1 31.9,52.68 30.86,53.72 26.04,53.72 v25.4,54.36
  Top 0.254: v25.4,54.36 BB.CAPE1.T8.18
  Bottom 0.254: v25.4,54.36 BB.CAPE1.T8.18
M1.LOW
  Top 0.152: U2.9 49.91,24.77 49.02,25.65 37.85,25.65 36.51,24.32 U4.Y
M1.PWM1.B  (via drill 0.38 pad 0.18)
  Top 0.152: U2.8 v48.64,24.89 | v68.96,19.18 R1.1
  Top 0.254: BB.CAPE1.B9.16 v22.86,6.1
  Power 0.152: v68.96,19.18 68.58,18.8 68.58,7.24 64.64,3.3 37.47,3.3 37.08,3.68 37.08,4.45 36.2,5.33 23.62,5.33 v22.86,6.1
  Bottom 0.152: v22.86,6.1 21.59,4.83 17.4,4.83 16.36,5.87 16.36,8.79 13.72,11.43 13.72,20.07 18.92,25.27 22.48,25.27 22.86,25.65 35.31,25.65 36.07,24.89 v48.64,24.89
  Bottom 0.254: BB.CAPE1.B9.16 v22.86,6.1
M2+  (via drill 0.81 pad 0.18)
  Top 0.508: 19.68,17.78 D12.K 21.59,17.78 21.59,13.97 D11.A 19.68,13.97 19.68,17.78 | 19.68,17.78 19.68,19.18
  Bottom 1.27: v20.45,15.88 20.83,15.49 34.54,15.49 41.91,22.86 58.17,22.86 X1.7
  pour Top: 21.72,18.41 21.72,14.73 19.56,14.73 19.56,18.8 19.3,19.05 19.3,22.61 19.56,22.61 19.56,20.57
M2-  (via drill 0.81 pad 0.18)
  Top 0.508: 17.91,17.78 D10.K 16,17.78 16,13.97 D9.A 17.91,13.97 17.91,17.78 | 17.91,17.78 17.91,19.18
  Bottom 1.27: v17.14,15.88 19.56,13.46 35.43,13.46 40.26,18.29 57.4,18.29 X1.8
  pour Top: 18.03,18.8 18.03,14.73 15.88,14.73 15.88,18.41 18.03,20.57 18.03,22.61 18.29,22.61 18.29,19.05
M2.HIGH  (via drill 0.38 pad 0.18)
  Top 0.152: 32.61,25.88 32.61,47.93 31.6,48.95 31.6,52.53 30.79,53.34 23.88,53.34 v22.86,54.36 | 32.61,25.88 32.61,25.4 | 32.61,25.4 32.61,22.71 30.92,21.02 U5.IN0 | U3.7 21.97,24.77 22.86,25.65 28.45,25.65 28.83,26.04 29.84,26.04 30.23,25.65 32.36,25.65 32.61,25.4 | 32.61,25.88 32.38,25.65 32.51,25.65
  Top 0.254: BB.CAPE1.T8.16 v22.86,54.36
  Bottom 0.254: v22.86,54.36 BB.CAPE1.T8.16
M2.LOW
  Top 0.152: U3.9 24.51,24.77 25.02,25.27 28.57,25.27 28.96,25.65 29.72,25.65 30.92,24.45 U5.Y
M2.PWM1.A  (via drill 0.38 pad 0.18)
  Top 0.152: U3.8 v23.24,24.89 | R2.1 v69.72,26.92
  Top 0.254: BB.CAPE1.B9.14 v20.32,6.1
  Power 0.152: v20.32,6.1 21.46,4.95 36.07,4.95 36.7,4.32 36.7,3.56 37.34,2.92 64.77,2.92 68.96,7.11 68.96,18.03 69.72,18.8 v69.72,26.92
  Bottom 0.152: v23.24,24.89 19.05,24.89 14.1,19.94 14.1,11.51 16.66,8.94 16.66,6.07 17.4,5.33 19.56,5.33 v20.32,6.1
  Bottom 0.254: BB.CAPE1.B9.14 v20.32,6.1
M3+  (via drill 0.81 pad 0.18)
  Top 0.508: 17.91,40.64 D16.K 16,40.64 16,44.45 D15.A 17.91,44.45 17.91,40.64 | 17.91,40.64 17.91,39.24
  Bottom 1.27: v17.14,42.55 19.56,44.96 35.31,44.96 40.13,40.13 57.4,40.13 X1.3
  pour Top: 15.88,40.01 15.88,43.69 18.03,43.69 18.03,39.62 18.29,39.37 18.29,35.81 18.03,35.81 18.03,37.85
M3-  (via drill 0.81 pad 0.18)
  Top 0.508: 19.68,40.64 D14.K 21.59,40.64 21.59,44.45 D13.A 19.68,44.45 19.68,40.64 | 19.68,40.64 19.68,39.24
  Bottom 1.27: v20.45,42.55 20.83,42.93 34.54,42.93 41.91,35.56 58.17,35.56 X1.4
  pour Top: 19.56,39.62 19.56,43.69 21.72,43.69 21.72,40.01 19.56,37.85 19.56,35.81 19.3,35.81 19.3,39.37
M3.HIGH  (via drill 0.38 pad 0.18)
  Top 0.152: U3.13 23.24,33.66 23.75,33.15 27.3,33.15 28.45,34.29 28.45,36.2 29.02,36.77 U7.IN0 29.02,38.65 32.31,41.94 32.31,47.78 31.29,48.79 31.29,52.38 30.71,52.96 21.72,52.96 v20.32,54.36
  Top 0.254: v20.32,54.36 BB.CAPE1.T8.14
  Bottom 0.254: v20.32,54.36 BB.CAPE1.T8.14
M3.LOW
  Top 0.152: U3.15 20.7,33.66 21.59,32.77 27.43,32.77 29.02,34.36 U7.Y
M3.PWM2.B  (via drill 0.38 pad 0.18)
  Top 0.152: U3.14 v21.97,33.53 | v69.72,31.5 R3.2
  Top 0.254: BB.CAPE1.T8.13 v20.32,52.32
  Power 0.152: v20.32,52.32 21.51,53.52 66.88,53.52 69.34,51.05 69.34,40.01 69.72,39.62 v69.72,31.5
  Bottom 0.152: v20.32,52.32 19.3,53.34 11.56,53.34 10.92,52.7 10.92,38.23 15.24,33.91 21.59,33.91 v21.97,33.53
  Bottom 0.254: BB.CAPE1.T8.13 v20.32,52.32
M4+  (via drill 0.81 pad 0.18)
  Top 0.508: 43.31,40.64 D8.K 41.4,40.64 41.4,44.45 D7.A 43.31,44.45 43.31,40.89 43.31,40.64 | 43.31,40.64 43.31,39.24
  Power 1.27: v42.55,42.55 44.7,44.7 57.15,44.7 X1.1
  pour Top: 41.27,40.01 41.27,43.69 43.43,43.69 43.43,39.62 43.69,39.37 43.69,35.81 43.43,35.81 43.43,37.85
M4-  (via drill 0.81 pad 0.18)
  Top 0.508: 45.09,40.64 D6.K 46.99,40.64 46.99,44.45 D5.A 45.09,44.45 45.09,41.27 45.09,40.64 | 45.09,40.64 45.09,39.24
  Power 1.27: v45.85,42.55 46.61,41.78 58.04,41.78 X1.2
  pour Top: 44.96,39.62 44.96,43.69 47.12,43.69 47.12,40.01 44.96,37.85 44.96,35.81 44.7,35.81 44.7,39.37
M4.HIGH  (via drill 0.38 pad 0.18)
  Top 0.152: U2.13 48.64,33.66 47.75,32.77 37.08,32.77 36.7,32.38 35.69,32.38 33.22,34.85 33.22,36.02 34.61,37.4 U6.IN0 34.61,38.64 33.22,40.03 33.22,48.23 32.21,49.25 32.21,52.65 33.27,53.72 34.92,53.72 v35.56,54.36
  Top 0.254: v35.56,54.36 BB.CAPE1.B8.26
  Bottom 0.254: BB.CAPE1.B8.26 v35.56,54.36
M4.LOW
  Top 0.152: U2.15 46.1,33.66 45.59,33.15 36.96,33.15 36.58,32.77 35.81,32.77 34.61,33.97 U6.Y
M4.PWM2.A  (via drill 0.38 pad 0.18)
  Top 0.152: U2.14 v47.37,33.53 | R4.2 v68.96,39.24
  Top 0.254: BB.CAPE1.T8.19 v27.94,52.32
  Power 0.152: v68.96,39.24 68.96,50.93 66.73,53.16 28.78,53.16 v27.94,52.32
  Bottom 0.152: v47.37,33.53 37.34,33.53 36.58,32.77 30.23,32.77 29.46,33.53 23.11,33.53 22.35,34.29 15.37,34.29 11.3,38.35 11.3,46.74 13.72,49.15 26.29,49.15 26.67,49.53 26.67,51.69 27.3,52.32 v27.94,52.32
  Bottom 0.254: BB.CAPE1.T8.19 v27.94,52.32
N$3
  Top 0.152: R1.2 M1.A
N$4
  Top 0.152: M2.A 68.96,23.62 69.72,24.38 R2.2
N$5
  Top 0.152: M3.A 68.96,34.8 69.72,34.04 R3.1
N$6
  Top 0.152: M4.A R4.1
P8.3  (via drill 0.38 pad 0.18)
  Top 0.254: v7.62,52.32 BB.CAPE1.B8.3
  Bottom 0.254: BB.CAPE1.B8.3 v7.62,52.32
P8.4  (via drill 0.38 pad 0.18)
  Top 0.254: v7.62,54.36 BB.CAPE1.B8.4
  Bottom 0.254: BB.CAPE1.B8.4 v7.62,54.36
P8.5  (via drill 0.38 pad 0.18)
  Top 0.254: v10.16,52.32 BB.CAPE1.B8.5
  Bottom 0.254: BB.CAPE1.B8.5 v10.16,52.32
P8.6  (via drill 0.38 pad 0.18)
  Top 0.254: v10.16,54.36 BB.CAPE1.B8.6
  Bottom 0.254: BB.CAPE1.B8.6 v10.16,54.36
P8.7  (via drill 0.38 pad 0.18)
  Top 0.254: v12.7,52.32 BB.CAPE1.T8.7
  Bottom 0.254: BB.CAPE1.T8.7 v12.7,52.32
P8.8  (via drill 0.38 pad 0.18)
  Top 0.254: v12.7,54.36 BB.CAPE1.T8.8
  Bottom 0.254: BB.CAPE1.T8.8 v12.7,54.36
P8.9  (via drill 0.38 pad 0.18)
  Top 0.254: v15.24,52.32 BB.CAPE1.B8.9
  Bottom 0.254: BB.CAPE1.B8.9 v15.24,52.32
P8.10  (via drill 0.38 pad 0.18)
  Top 0.254: v15.24,54.36 BB.CAPE1.T8.10
  Bottom 0.254: BB.CAPE1.T8.10 v15.24,54.36
P8.11  (via drill 0.38 pad 0.18)
  Top 0.254: v17.78,52.32 BB.CAPE1.T8.11
  Bottom 0.254: BB.CAPE1.T8.11 v17.78,52.32
P8.12  (via drill 0.38 pad 0.18)
  Top 0.254: v17.78,54.36 BB.CAPE1.T8.12
  Bottom 0.254: BB.CAPE1.T8.12 v17.78,54.36
P8.15  (via drill 0.38 pad 0.18)
  Top 0.254: v22.86,52.32 BB.CAPE1.T8.15
  Bottom 0.254: BB.CAPE1.T8.15 v22.86,52.32
P8.17  (via drill 0.38 pad 0.18)
  Top 0.254: v25.4,52.32 BB.CAPE1.B8.17
  Bottom 0.254: BB.CAPE1.B8.17 v25.4,52.32
P8.20  (via drill 0.38 pad 0.18)
  Top 0.254: v27.94,54.36 BB.CAPE1.T8.20
  Bottom 0.254: BB.CAPE1.T8.20 v27.94,54.36
P8.21  (via drill 0.38 pad 0.18)
  Top 0.254: BB.CAPE1.B8.21 v30.48,52.32
  Bottom 0.254: v30.48,52.32 BB.CAPE1.B8.21
P8.22  (via drill 0.38 pad 0.18)
  Top 0.254: v30.48,54.36 BB.CAPE1.B8.22
  Bottom 0.254: BB.CAPE1.B8.22 v30.48,54.36
P8.23  (via drill 0.38 pad 0.18)
  Top 0.254: v33.02,52.32 BB.CAPE1.T8.23
  Bottom 0.254: BB.CAPE1.T8.23 v33.02,52.32
P8.24  (via drill 0.38 pad 0.18)
  Top 0.254: v33.02,54.36 BB.CAPE1.T8.24
  Bottom 0.254: BB.CAPE1.T8.24 v33.02,54.36
P8.25  (via drill 0.38 pad 0.18)
  Top 0.254: v35.56,52.32 BB.CAPE1.T8.25
  Bottom 0.254: BB.CAPE1.T8.25 v35.56,52.32
P8.27  (via drill 0.38 pad 0.18)
  Top 0.254: v38.1,52.32 BB.CAPE1.T8.27
  Bottom 0.254: BB.CAPE1.T8.27 v38.1,52.32
P8.28  (via drill 0.38 pad 0.18)
  Top 0.254: v38.1,54.36 BB.CAPE1.T8.28
  Bottom 0.254: BB.CAPE1.T8.28 v38.1,54.36
P8.29  (via drill 0.38 pad 0.18)
  Top 0.254: BB.CAPE1.B8.29 v40.64,52.32
  Bottom 0.254: v40.64,52.32 BB.CAPE1.B8.29
P8.30  (via drill 0.38 pad 0.18)
  Top 0.254: BB.CAPE1.B8.30 v40.64,54.36
  Bottom 0.254: v40.64,54.36 BB.CAPE1.B8.30
P8.31  (via drill 0.38 pad 0.18)
  Top 0.254: BB.CAPE1.T8.31 v43.18,52.32
  Bottom 0.254: v43.18,52.32 BB.CAPE1.T8.31
P8.32  (via drill 0.38 pad 0.18)
  Top 0.254: BB.CAPE1.B8.32 v43.18,54.36
  Bottom 0.254: v43.18,54.36 BB.CAPE1.B8.32
P8.33  (via drill 0.38 pad 0.18)
  Top 0.254: BB.CAPE1.T8.33 v45.72,52.32
  Bottom 0.254: v45.72,52.32 BB.CAPE1.T8.33
P8.34  (via drill 0.38 pad 0.18)
  Top 0.254: BB.CAPE1.B8.34 v45.72,54.36
  Bottom 0.254: v45.72,54.36 BB.CAPE1.B8.34
P8.35  (via drill 0.38 pad 0.18)
  Top 0.254: BB.CAPE1.B8.35 v48.26,52.32
  Bottom 0.254: v48.26,52.32 BB.CAPE1.B8.35
P8.36  (via drill 0.38 pad 0.18)
  Top 0.254: BB.CAPE1.B8.36 v48.26,54.36
  Bottom 0.254: v48.26,54.36 BB.CAPE1.B8.36
P8.37  (via drill 0.38 pad 0.18)
  Top 0.254: BB.CAPE1.T8.37 v50.8,52.32
  Bottom 0.254: v50.8,52.32 BB.CAPE1.T8.37
P8.38  (via drill 0.38 pad 0.18)
  Top 0.254: BB.CAPE1.T8.38 v50.8,54.36
  Bottom 0.254: v50.8,54.36 BB.CAPE1.T8.38
P8.39  (via drill 0.38 pad 0.18)
  Top 0.254: BB.CAPE1.B8.39 v53.34,52.32
  Bottom 0.254: v53.34,52.32 BB.CAPE1.B8.39
P8.40  (via drill 0.38 pad 0.18)
  Top 0.254: BB.CAPE1.T8.40 v53.34,54.36
  Bottom 0.254: v53.34,54.36 BB.CAPE1.T8.40
P8.41  (via drill 0.38 pad 0.18)
  Top 0.254: BB.CAPE1.T8.41 v55.88,52.32
  Bottom 0.254: v55.88,52.32 BB.CAPE1.T8.41
P8.42  (via drill 0.38 pad 0.18)
  Top 0.254: BB.CAPE1.B8.42 v55.88,54.36
  Bottom 0.254: v55.88,54.36 BB.CAPE1.B8.42
P8.43  (via drill 0.38 pad 0.18)
  Top 0.254: BB.CAPE1.B8.43 v58.42,52.32
  Bottom 0.254: v58.42,52.32 BB.CAPE1.B8.43
P8.44  (via drill 0.38 pad 0.18)
  Top 0.254: BB.CAPE1.T8.44 v58.42,54.36
  Bottom 0.254: v58.42,54.36 BB.CAPE1.T8.44
P8.45  (via drill 0.38 pad 0.18)
  Top 0.254: v60.96,52.32 BB.CAPE1.T8.45
  Bottom 0.254: BB.CAPE1.T8.45 v60.96,52.32
P8.46  (via drill 0.38 pad 0.18)
  Top 0.254: v60.96,54.36 BB.CAPE1.B8.46
  Bottom 0.254: BB.CAPE1.B8.46 v60.96,54.36
P9.9  (via drill 0.38 pad 0.18)
  Top 0.254: v15.24,4.06 BB.CAPE1.T9.9
  Bottom 0.254: BB.CAPE1.T9.9 v15.24,4.06
P9.10  (via drill 0.38 pad 0.18)
  Top 0.254: v15.24,6.1 BB.CAPE1.B9.10
  Bottom 0.254: BB.CAPE1.B9.10 v15.24,6.1
P9.11  (via drill 0.38 pad 0.18)
  Top 0.254: v17.78,4.06 BB.CAPE1.B9.11
  Bottom 0.254: BB.CAPE1.B9.11 v17.78,4.06
P9.12  (via drill 0.38 pad 0.18)
  Top 0.254: BB.CAPE1.T9.12 v17.78,6.1
  Bottom 0.254: v17.78,6.1 BB.CAPE1.T9.12
P9.13  (via drill 0.38 pad 0.18)
  Top 0.254: v20.32,4.06 BB.CAPE1.T9.13
  Bottom 0.254: BB.CAPE1.T9.13 v20.32,4.06
P9.15  (via drill 0.38 pad 0.18)
  Top 0.254: v22.86,4.06 BB.CAPE1.T9.15
  Bottom 0.254: BB.CAPE1.T9.15 v22.86,4.06
P9.17  (via drill 0.38 pad 0.18)
  Top 0.254: v25.4,4.06 BB.CAPE1.B9.17
  Bottom 0.254: BB.CAPE1.B9.17 v25.4,4.06
P9.18  (via drill 0.38 pad 0.18)
  Top 0.254: v25.4,6.1 BB.CAPE1.T9.18
  Bottom 0.254: BB.CAPE1.T9.18 v25.4,6.1
P9.21  (via drill 0.38 pad 0.18)
  Top 0.254: v30.48,4.06 BB.CAPE1.B9.21
  Bottom 0.254: BB.CAPE1.B9.21 v30.48,4.06
P9.22  (via drill 0.38 pad 0.18)
  Top 0.254: v30.48,6.1 BB.CAPE1.T9.22
  Bottom 0.254: BB.CAPE1.T9.22 v30.48,6.1
P9.23  (via drill 0.38 pad 0.18)
  Top 0.254: v33.02,4.06 BB.CAPE1.T9.23
  Bottom 0.254: BB.CAPE1.T9.23 v33.02,4.06
P9.24  (via drill 0.38 pad 0.18)
  Top 0.254: v33.02,6.1 BB.CAPE1.T9.24
  Bottom 0.254: BB.CAPE1.T9.24 v33.02,6.1
P9.25  (via drill 0.38 pad 0.18)
  Top 0.254: v35.56,4.06 BB.CAPE1.B9.25
  Bottom 0.254: BB.CAPE1.B9.25 v35.56,4.06
P9.26  (via drill 0.38 pad 0.18)
  Top 0.254: v35.56,6.1 BB.CAPE1.T9.26
  Bottom 0.254: BB.CAPE1.T9.26 v35.56,6.1
P9.27  (via drill 0.38 pad 0.18)
  Top 0.254: v38.1,4.06 BB.CAPE1.B9.27
  Bottom 0.254: BB.CAPE1.B9.27 v38.1,4.06
P9.28  (via drill 0.38 pad 0.18)
  Top 0.254: v38.1,6.1 BB.CAPE1.T9.28
  Bottom 0.254: BB.CAPE1.T9.28 v38.1,6.1
P9.29  (via drill 0.38 pad 0.18)
  Top 0.254: v40.64,4.06 BB.CAPE1.T9.29
  Bottom 0.254: BB.CAPE1.T9.29 v40.64,4.06
P9.30  (via drill 0.38 pad 0.18)
  Top 0.254: v40.64,6.1 BB.CAPE1.B9.30
  Bottom 0.254: BB.CAPE1.B9.30 v40.64,6.1
P9.31  (via drill 0.38 pad 0.18)
  Top 0.254: v43.18,4.06 BB.CAPE1.T9.31
  Bottom 0.254: BB.CAPE1.T9.31 v43.18,4.06
P9.32  (via drill 0.38 pad 0.18)
  Top 0.254: v43.18,6.1 BB.CAPE1.T9.32
  Bottom 0.254: BB.CAPE1.T9.32 v43.18,6.1
P9.33  (via drill 0.38 pad 0.18)
  Top 0.254: v45.72,4.06 BB.CAPE1.B9.33
  Bottom 0.254: BB.CAPE1.B9.33 v45.72,4.06
P9.34  (via drill 0.38 pad 0.18)
  Top 0.254: v45.72,6.1 BB.CAPE1.T9.34
  Bottom 0.254: BB.CAPE1.T9.34 v45.72,6.1
P9.35  (via drill 0.38 pad 0.18)
  Top 0.254: v48.26,4.06 BB.CAPE1.T9.35
  Bottom 0.254: BB.CAPE1.T9.35 v48.26,4.06
P9.36  (via drill 0.38 pad 0.18)
  Top 0.254: v48.26,6.1 BB.CAPE1.B9.36
  Bottom 0.254: BB.CAPE1.B9.36 v48.26,6.1
P9.37  (via drill 0.38 pad 0.18)
  Top 0.254: v50.8,4.06 BB.CAPE1.T9.37
  Bottom 0.254: BB.CAPE1.T9.37 v50.8,4.06
P9.38  (via drill 0.38 pad 0.18)
  Top 0.254: v50.8,6.1 BB.CAPE1.T9.38
  Bottom 0.254: BB.CAPE1.T9.38 v50.8,6.1
P9.39  (via drill 0.38 pad 0.18)
  Top 0.254: v53.34,4.06 BB.CAPE1.B9.39
  Bottom 0.254: BB.CAPE1.B9.39 v53.34,4.06
P9.40  (via drill 0.38 pad 0.18)
  Top 0.254: v53.34,6.1 BB.CAPE1.B9.40
  Bottom 0.254: BB.CAPE1.B9.40 v53.34,6.1
P9.41  (via drill 0.38 pad 0.18)
  Top 0.254: v55.88,4.06 BB.CAPE1.B9.41
  Bottom 0.254: BB.CAPE1.B9.41 v55.88,4.06
P9.42  (via drill 0.38 pad 0.18)
  Top 0.254: v55.88,6.1 BB.CAPE1.T9.42
  Bottom 0.254: BB.CAPE1.T9.42 v55.88,6.1
SCL  (via drill 0.38 pad 0.18)
  Top 0.152: v27.94,4.06 29.21,5.33 29.21,9.39 R10.1 29.98,10.79 29.47,11.29 U1.6
  Top 0.254: v27.94,4.06 BB.CAPE1.T9.19
  Bottom 0.254: v27.94,4.06 BB.CAPE1.T9.19
SDA  (via drill 0.38 pad 0.18)
  Top 0.152: U1.5 28.97,11.32 28.44,10.79 R9.1 28.44,9.64 27.94,9.14 BB.CAPE1.T9.20
  Top 0.254: v27.94,6.1 BB.CAPE1.T9.20
  Bottom 0.254: v27.94,6.1 BB.CAPE1.T9.20
SYS.VOUT  (via drill 0.81 pad 0.18)
  other vias: 12.7,4.32 12.7,5.84
  pour Bottom: 11.68,7.75 11.68,2.41 12.06,2.03 13.34,2.03 13.72,2.41 13.72,7.75 13.46,8 11.94,8
  pour Top: 13.34,8.13 12.06,8.13 11.68,7.75 11.68,2.41 12.06,2.03 13.34,2.03 13.72,2.41 13.72,7.75
VCC  (via drill 0.38 pad 0.18, 0.61 pad 0.18, 0.81 pad 0.18)
  Top 0.254: U5.VCC 29.97,23.37 29.84,23.5 C4.1 29.34,24.5 v29.34,24.89 | U4.VCC 35.56,23.37 35.42,23.5 C2.1 34.92,24.5 v34.92,24.89 | U6.VCC 35.56,35.05 35.7,34.92 C3.1 36.2,33.92 v36.2,33.53 | U7.VCC 29.97,35.05 30.11,34.92 C5.1 30.61,33.92 v30.61,33.53
  other vias: 7.62,4.32 13.21,32.64 7.62,5.84
  pour Bottom: 8.26,9.78 8.26,26.92 13.72,32.38 13.72,32.89 13.46,33.15 12.95,33.15 6.99,27.18 6.99,9.78 6.6,9.4 6.6,2.41 6.99,2.03 8.26,2.03 8.64,2.41 8.64,9.4
  pour Top (rank 2): 6.6,-0.38 37.21,-0.38 37.21,9.14 32.77,13.59 29.72,13.59 29.72,15.75 30.35,16.38 30.35,19.05 29.97,19.43 27.56,19.43 26.67,19.43 26.29,19.05 26.29,17.02 27.94,15.37 27.94,13.34 26.29,11.68 26.29,0.89 9.4,0.89 8.64,1.65 8.64,9.4 8.38,9.65 6.86,9.65 6.6,9.4
  pour Power: 27.18,33.91 36.32,33.91 36.58,33.66 36.58,26.04 35.05,24.51 29.21,24.51 28.96,24.77 28.96,28.83 23.5,34.29 16.13,34.29 13.97,32.13 12.95,32.13 12.7,32.38 12.7,32.89 12.95,33.15 13.84,33.15 15.88,35.18 25.91,35.18
VIN  (via drill 0.81 pad 0.18)
  Top 0.508: D9.K 13.97,13.97 13.97,12.7 | D11.K 23.62,13.97 23.62,12.7 | D15.K 13.97,44.45 13.97,45.72 | D13.K 23.62,44.45 23.62,45.72 | D7.K 39.37,44.45 39.37,45.72 | D5.K 49.02,44.45 49.02,45.72 | D3.K 49.02,13.97 49.02,12.7 | D1.K 39.37,13.97 39.37,12.7
  other vias: 21.34,20.57 22.61,20.57 48.01,20.57 46.74,20.57 18.8,47.37 17.53,47.37 20.07,47.37 44.2,47.37 42.93,47.37 45.47,47.37 44.2,11.05 42.93,11.05 45.47,11.05 18.8,11.05 17.53,11.05 20.07,11.05
  pour Power: 59.56,25.91 61.34,24.13 61.34,11.05 60.2,9.91 48.01,9.91 45.85,12.06 42.55,12.06 42.04,11.56 21.08,11.56 20.57,12.06 17.14,12.06 16.64,11.56 16.64,10.54 17.14,10.03 20.57,10.03 21.08,10.54 42.04,10.54 42.55,10.03 45.85,10.03 47.12,8.76 60.71,8.76 62.36,10.41 62.36,48.01 60.71,49.66 47.12,49.66 45.85,48.39 42.55,48.39 42.04,47.88 20.95,47.88 20.45,48.39 17.14,48.39 16.64,47.88 16.64,46.86 17.14,46.35 20.45,46.35 20.95,46.86 42.04,46.86 42.55,46.35 45.85,46.35 48.01,48.51 60.2,48.51 61.34,47.37 61.34,30.48 59.56,28.7 57.4,28.7 49.91,21.21 48.9,21.21 48.51,21.59 46.35,21.59 45.97,21.21 23.37,21.21 22.99,21.59 20.95,21.59 20.45,21.08 20.45,20.07 20.95,19.56 22.99,19.56 23.37,19.94 45.97,19.94 46.35,19.56 48.51,19.56 48.9,19.94 50.67,19.94 56.64,25.91
  pour Top: 24.51,20.32 24.51,20.83 24.13,21.21 21.08,21.21 20.95,21.34 20.95,22.61 20.45,22.61 20.45,20.7 21.21,19.94 24.13,19.94
  pour Top: 50.04,20.32 50.04,20.83 49.66,21.21 46.48,21.21 46.35,21.34 46.35,22.61 45.85,22.61 45.85,20.7 46.61,19.94 49.66,19.94
  pour Top: 39.5,43.81 39.5,45.72 40.39,46.61 48.01,46.61 48.9,45.72 48.9,43.81 50.16,43.81 50.16,47.12 49.15,48.13 39.24,48.13 38.23,47.12 38.23,43.81
  pour Top: 23.5,14.61 23.5,12.7 22.61,11.81 14.99,11.81 14.1,12.7 14.1,14.61 12.83,14.61 12.83,11.3 13.84,10.29 23.75,10.29 24.77,11.3 24.77,14.61
  pour Top: 48.9,14.61 48.9,12.7 48.01,11.81 40.39,11.81 39.5,12.7 39.5,14.61 38.23,14.61 38.23,11.3 39.24,10.29 49.15,10.29 50.16,11.3 50.16,14.61
  pour Top: 14.1,43.81 14.1,45.72 14.99,46.61 22.61,46.61 23.5,45.72 23.5,43.81 24.77,43.81 24.77,47.12 23.75,48.13 13.84,48.13 12.83,47.12 12.83,43.81
WP  (via drill 0.38 pad 0.18)
  Top 0.152: U1.7 29.97,11.94 30.48,11.43 32.25,11.43 R8.1 34.29,9.39 v34.29,4.32
  Power 0.152: JMP1.1 3.3,8.76 3.3,4.06 5.84,1.52 32.26,1.52 34.29,3.56 v34.29,4.32

## Text on the board
tPlace: 4 | Motor | + | - | A2 | 3 | Motor | + | Cape | - | Motor | GND | Up to / 46V IN | 2 | Motor | + | BeagleBone | - | A1 | A0 | 1 | Motor | + | EEPROM / WP | -